# Altium PCB ESP32 PCB V1.PcbDoc (part 3 of 4)
Units mil, origin at the board's own origin, x right, y up, seen from the top; angles counter-clockwise.
Board outline 2700 x 1000 mil, 4 copper layers (L1, L2, L3, L4), stack 61.581 mil thick; 64 components, 73 nets, 299 pads, 162 vias.
Unrouted connection lines stored in the file: 1.
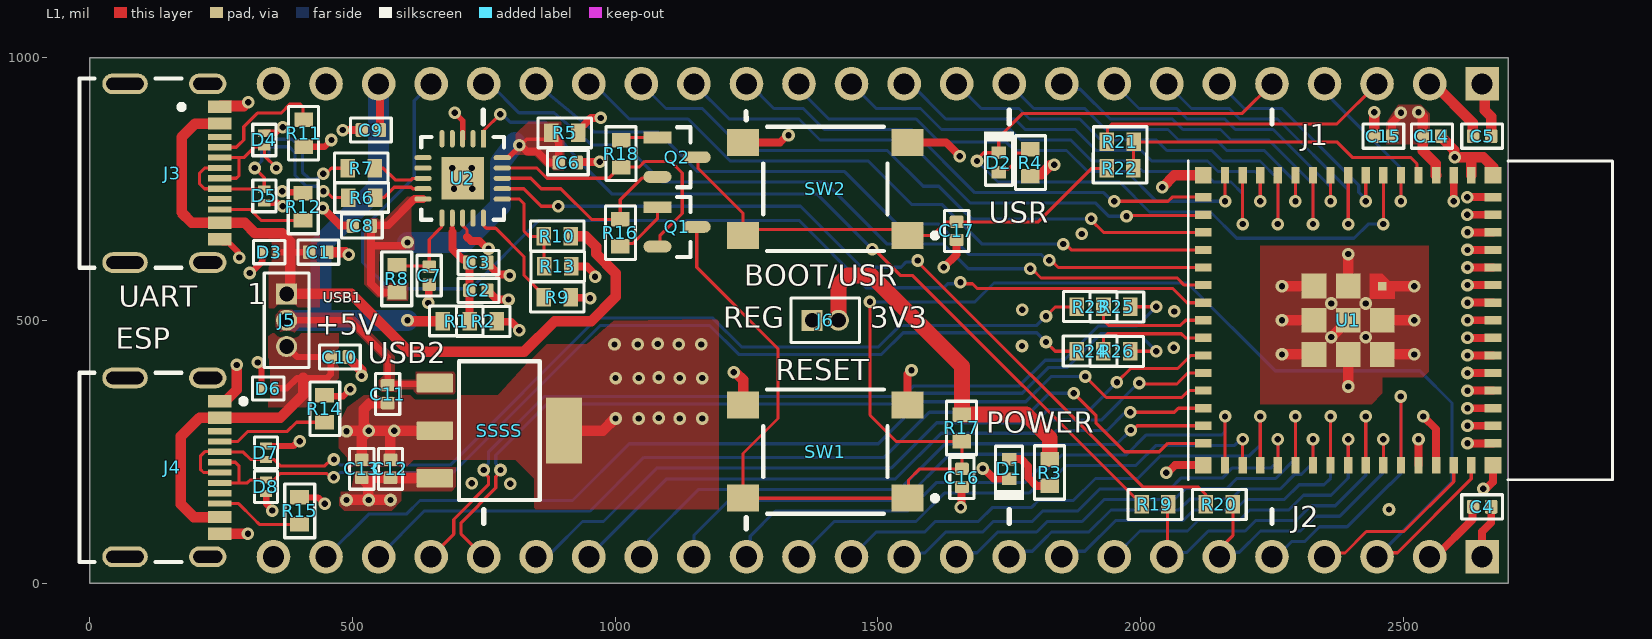
[diagram p0: L1 view]

## Via types
v1: diameter 24, hole 12, L1 to L4, tented both sides, 162 vias

## Nets (pads, with @x,y where several pads share a name; then routed paths per layer and width w, separated by ;. In a path a pad name is that pad's centre, name@x,y a point inside that pad or via, vN(x,y) a via of type N, cw(c..) or ccw(c..) an arc to the next point about the centre after c; other vN are vias at no path point) (continued)
+5V_VBUS2: (continued)
  L1 w20: J4.B4A9@247.64,125.59 198.41,125.59 174,150 174,279.31 209.25,314.57 J4.A4B9@247.64,314.57 363.19,314.57 406.66,358.03 406.66,390.16
+VCC_FTDI: C2.2 C3.1 R1.2 R2.2 U2.12 | length 216
  L1 w6: 690.31,675 U2.12@690.31,694.59
  L1 w10.72: 690.31,668.07 690.31,675
  L1 w15: 690.31,668.07 690.31,635.79 710.42,615.69 718.48,615.69 722.8,611.38 C3.1@722.8,610 ; C2.2@722.83,557.07 C3.1@722.83,611.35 ; C2.2@722.85,557.04 723.19,556.7 723.19,498.79 R1.2@723.53,498.45
BTN_GPIO0: C17.2 Q2.3 R22.1 SW2.1 SW2.2 | length 939.5
  L1 w6: Q2.3@1155.42,810.24 1157.53,808.13 1157.53,789.83 1243.5,703.86 SW2.2@1243.5,661.42 1255.09,673 1544.91,673 SW2.1@1556.5,661.42 1604.33,661.42 1630.12,687.2 C17.2@1650,687.2 1805.26,687.2 1907.11,789.06 R22.1@1935.23,789.06
CHIP_PU: C16.2 J2.3 Q1.3 R17.1 SW1.1 SW1.2 U1.45 | length 3365.7
  L1 w6: Q1.3@1155.42,677.72 1155.42,600.58 1310,446 1310,313 1243.5,246.5 SW1.2@1243.5,161.42 SW1.1@1556.5,161.42 1558.46,163.38 1558.46,196.15 1579.52,217.2 C16.2@1660,217.2 R17.1@1660,269.41 1535,269.41 1485,319.41 v1(1485,535) ; J2.3@2450,50 2457.64,57.64 2488.83,57.64 2629.29,198.1 U1.45@2629.29,224.41
  L4 w6: v1(1485,535) 1685,535 1721,571 2089,571 2256,404 2531,404 2592.5,342.5 2592.5,192.5 J2.3@2450,50
CON1_USB_N: D4.2 J3.A7 J3.B7 R6.1 | length 476.1
  L1 w6.03: J3.A7@247.64,770.08 279.32,770.08 284.67,775.43 284.67,809.45 ; J3.B7@247.64,809.45 284.67,809.45 ; v1(355,789.76) 355,790.67 332.61,813.05 D4.2@332.61,830.3 314.17,830.3 293.31,809.45 284.67,809.45 ; v1(445.08,745.63) 449.94,745.63 461.96,733.61 R6.1@491.99,733.61
  L4 w6.03: v1(355,789.76) 341.6,803.16 341.6,826.52 345.36,830.28 379.72,830.28 390.97,819.03 390.97,776.1 412.11,754.96 432.56,754.96 441.89,745.63 v1(445.08,745.63)
CON1_USB_P: D5.2 J3.A6 J3.B6 R7.1 | length 519.6
  L1 w6.03: J3.A6@247.64,789.76 219.09,789.76 209.25,779.92 209.25,759.8 218.66,750.39 J3.B6@247.64,750.39 248.13,749.9 332.01,749.9 D5.2@332.5,749.41 332.5,771.43 v1(314.17,789.76) ; v1(444.54,778.54) 449.41,778.54 455.79,784.93 455.86,784.93 460.28,789.34 R7.1@491.25,789.34
  L4 w6.03: v1(314.17,789.76) 327.57,803.16 327.57,832.33 339.55,844.31 385.53,844.31 405,824.84 405,781.91 417.92,768.99 432.03,768.99 441.58,778.54 v1(444.54,778.54)
CON2_USB_N: D7.2 J4.A7 J4.B7 R23.1 | length 1926.5
  L1 w6.03: J4.A7@247.64,210.24 216.92,210.24 211.02,216.14 211.02,241.53 219.49,250 247.24,250 J4.B7@247.64,249.61 291.87,249.61 306.24,235.23 D7.2@335.77,235.23 ; v1(1820,507.92) 1837.08,525 1877.84,525 R23.1@1878.48,525.64
  L1 w6.23: D7.2@335.77,235.23 350.69,235.23 363.16,222.77 447.96,222.77 460.19,235 v1(465,235)
  L4 w6.03: v1(465,235) 466.96,235 477.52,224.44 686.07,224.44 965.66,504.03 1185.97,504.03 1240.97,449.03 1501.14,449.03 1542.41,490.31 1802.38,490.31 v1(1820,507.92)
CON2_USB_P: D8.2 J4.A6 J4.B6 R24.1 | length 1884.8
  L1 w6.03: J4.B6@247.64,190.55 300.34,190.55 305.86,196.07 D8.2@335.75,196.07 350.58,196.07 363.14,208.64 450.95,208.64 454.63,204.95 461.11,204.95 v1(464.55,201.52) ; J4.A6@247.64,229.92 277.12,229.92 284.53,222.51 284.53,192.71 ; v1(1820,458.66) 1837.72,440.94 R24.1@1878.22,440.94
  L4 w6.03: v1(464.55,201.52) 468.17,201.52 477.06,210.41 691.88,210.41 971.47,490 1180.16,490 1235.16,435 1506.95,435 1548.22,476.28 1802.38,476.28 v1(1820,458.66)
CON_ESP_USB_N: J2.21 R25.1 | length 1686.5
  L1 w6.03: J2.21@650,50 692.99,92.98 692.99,120.81 758.99,186.81 758.99,202.48 750,211.47 v1(750,215) ; R25.1@1980.59,525.59 v1(2030,525.59)
  L4 w6.03: v1(750,215) 750,218.53 758.99,227.52 758.99,248.83 865.16,355 1548.22,355 1568.27,375.05 1769.26,375.05 1818.24,424.03 1854.22,424.03 1919.22,489.03 1993.44,489.03 v1(2030,525.59)
CON_ESP_USB_P: J2.20 R26.1 | length 1662
  L1 w6.03: J2.20@750,50 707.01,92.98 707.01,115 773.01,181 773.01,202.48 782,211.47 v1(782,215) ; R26.1@1980.35,440.94 v1(2029.76,440.94)
  L4 w6.03: v1(782,215) 782,218.53 773.01,227.52 773.01,243.02 870.97,340.97 1554.04,340.97 1574.08,361.02 1775.07,361.02 1824.06,410 1860.03,410 1925.03,475 1995.71,475 v1(2029.76,440.94)
CON_GPIO0: J1.3 R21.1 | length 574.4
  L1 w6: R21.1@1935.76,839.37 1937,840.61 1937,865 1945.69,873.69 2373.69,873.69 J1.3@2450,950